# Altium PCB 2024_Nov_24_Esp32.PcbDoc
Units mil, origin at the board's own origin, x right, y up, seen from the top; angles counter-clockwise.
Board outline 3582.68 x 2204.72 mil, 2 copper layers (Top Layer, Bottom Layer); 62 components, 37 nets, 230 pads, 75 vias.
Unrouted connection lines stored in the file: 40.
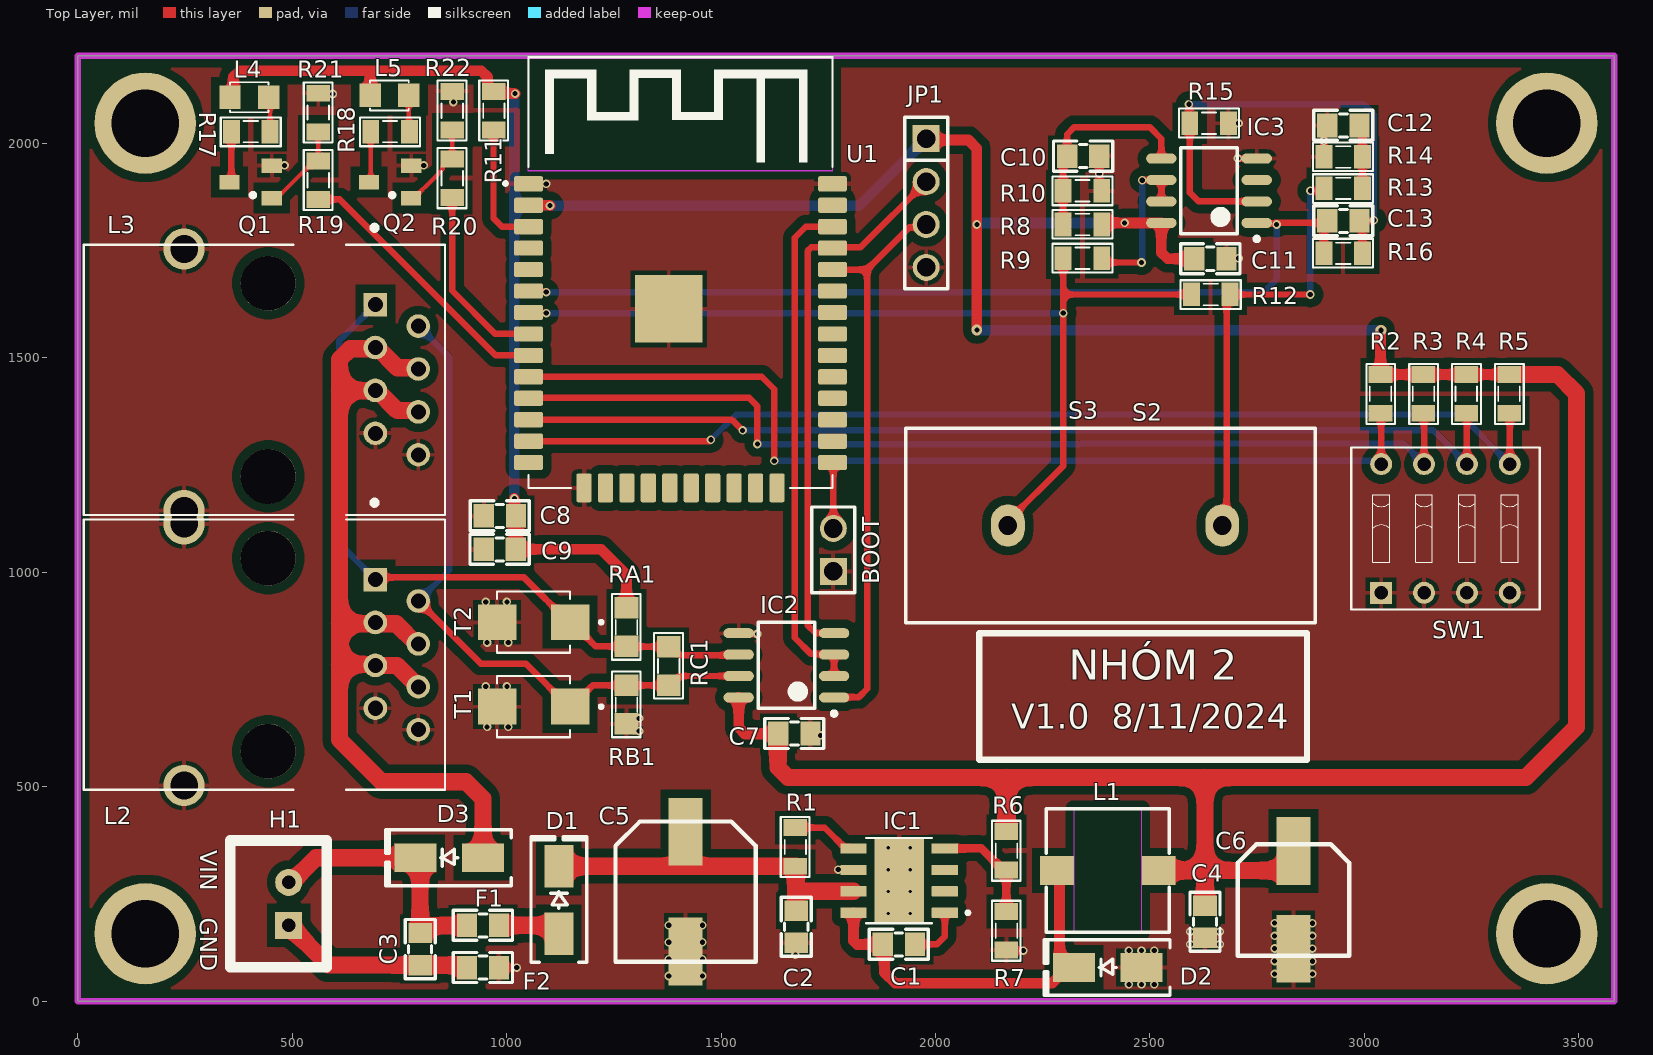
[diagram p0: Top Layer view]
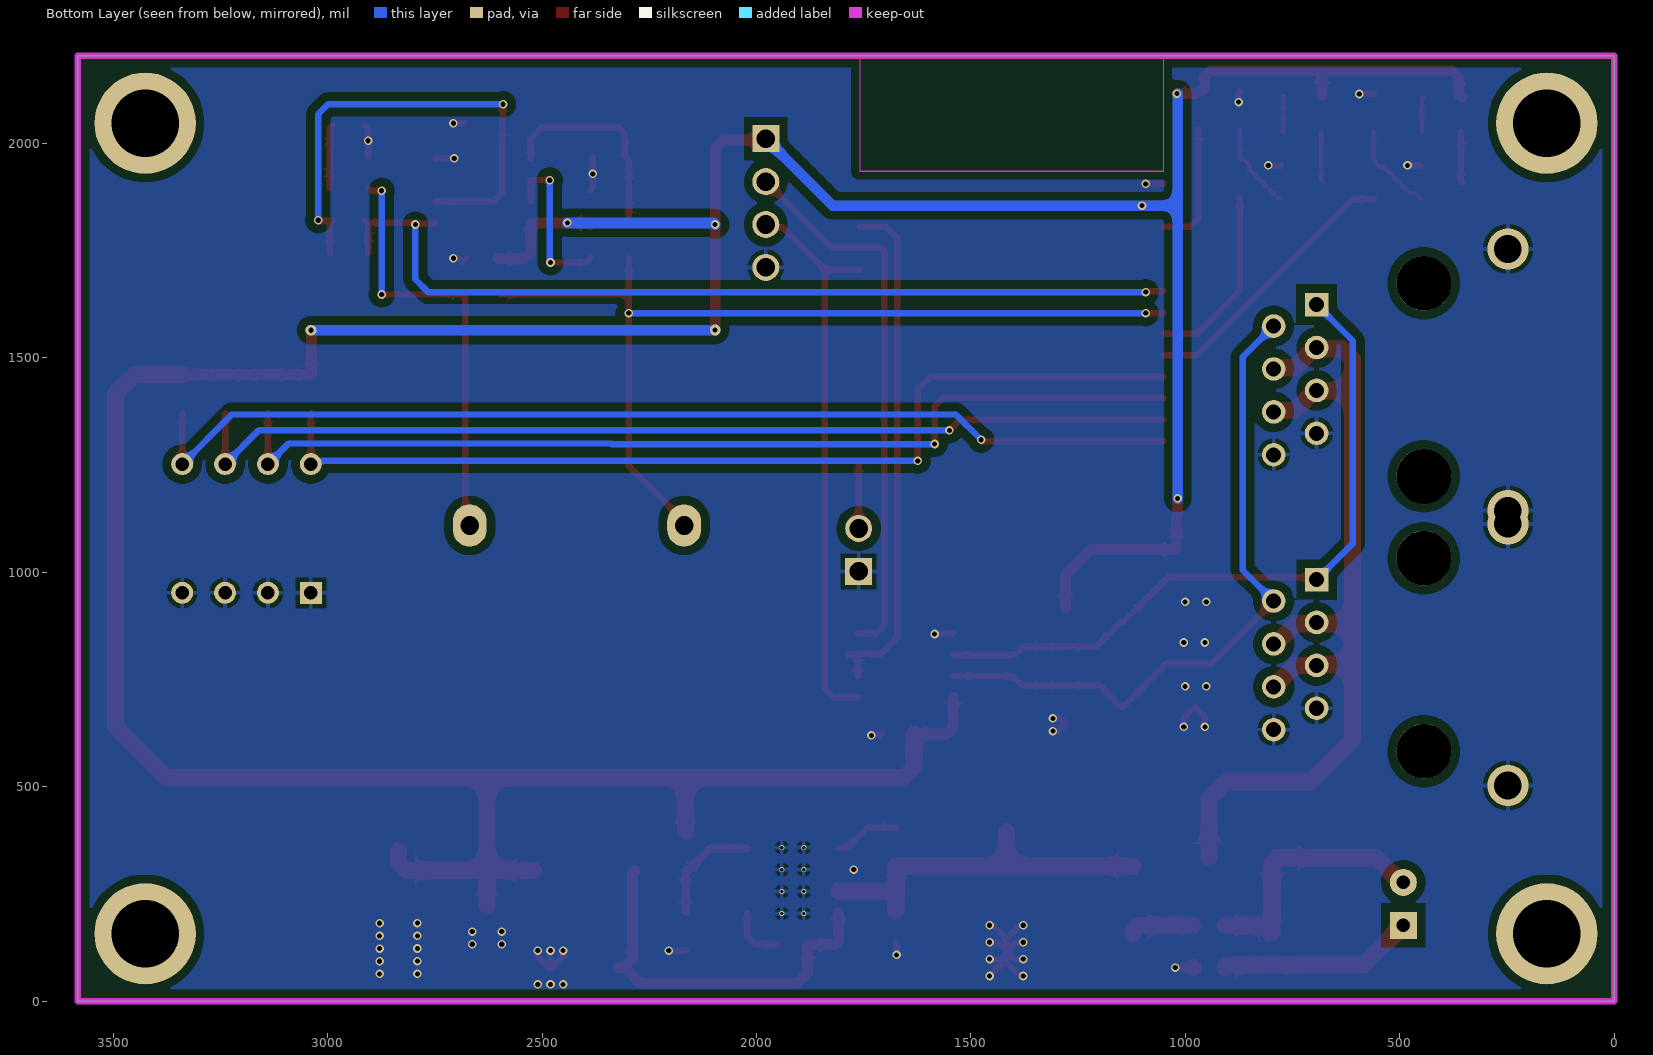
[diagram p1: Bottom Layer view, seen from below]
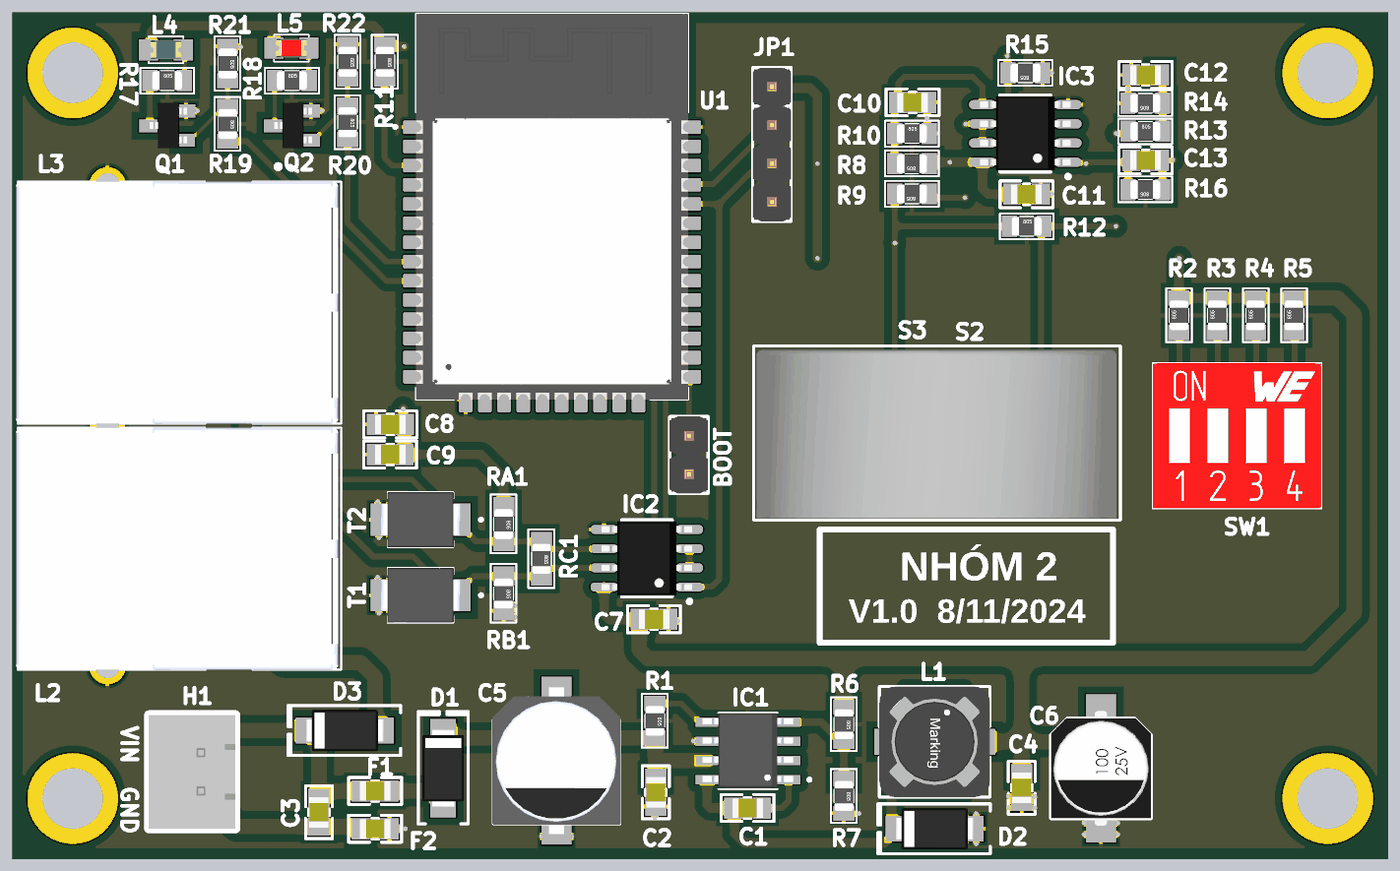
[diagram p2: 3D render of the assembled board from above, using the file's embedded part models]

## Layer stack, top to bottom
Top Solder: solder mask 0.4, Solder Resist, Dk 3.5
Top Layer: signal copper 1.4
Dielectric 1: dielectric 12.6, FR-4, Dk 4.8
Bottom Layer: signal copper 1.4
Bottom Solder: solder mask 0.4, Solder Resist, Dk 3.5

## Board outline
0,0 0,2204.72 3582.68,2204.72 3582.68,0

## Design rules (kind name [scope] priority, off if disabled: settings)
Clearance [All] p1: gap=20 ignorepadtopadclearanceinfootprint=FALSE
PolygonConnect [All] p1: thpad.connectstyle=Relief thpad.reliefconductorwidth=10 thpad.reliefentries=4 thpad.polygonreliefangle="90 Angle" thpad.airgapwidth=10 smdpad.connectstyle=Relief smdpad.reliefconductorwidth=10 smdpad.reliefentries=4 smdpad.polygonreliefangle="90 Angle" smdpad.airgapwidth=10 via.connectstyle=Direct via.reliefconductorwidth=10 via.reliefentries=4 via.polygonreliefangle="90 Angle" via.airgapwidth=10
RoutingVias [All] p1: holewidth=12 width=20 viastyle="Through Hole" minholewidth=12 minwidth=20 maxholewidth=12 maxwidth=20
SolderMaskExpansion [All] p1: expansion=4 istentingtop=FALSE
Width [All] p1: maxlimit=70 minlimit=10 preferedwidth=20
30 further rules are at their usual default settings.

## Classes and differential pairs
component class 2024_Nov_24_Esp32: BOOT C2 C7 C8 C9 C10 C12 D2 D3 F1 F2 H1 IC1 IC2 IC3 JP1 L1 L3 L4 L5 q Q1 Q2 R1 R2 R3 R4 R5 R6 R7 R8 R9 R10 R13 R14 R15

## Components (designator, comment, footprint, x,y, rotation, side; value= is the part's Value field where it differs from the comment)
BOOT "JUMPER" "JP 1x2 DT" 1761.81,1002.36 r90 top (schematic designator JP2)
C1 "104" "tu 0805"#1 1909.45,137.8 r0 top
C2 "105" "tu 0805"#1 1680.67,178.82 r270 top
C3 "105" "tu 0805"#1 803.69,126.86 r270 top
C4 "104" "tu 0805"#1 2623.24,180.37 r90 top
C5 "100uF/35V" "tu nhom 8 (f)" 1417.32,255.91 r270 top
C6 "220uF/16V" "tu nhom 6.3 (d)" 2834.65,236.22 r270 top
C7 "104" "tu 0805"#2 1670.86,624.44 r0 top
C8 "22uF" "tu 0805"#2 984.25,1131.89 r0 top
C9 "104" "tu 0805"#2 983.88,1053.75 r0 top
C10 "105" "tu 0805"#1 2339.11,1975.56 r0 top
C11 "104" "tu 0805"#1 2645.93,1726.23 r180 top
C12 "104" "tu 0805"#1 2945.76,2047.06 r0 top
C13 "104" "tu 0805"#1 2945.76,1824.67 r0 top
D1 "SS34" "DIODE SMA" 1122.05,236.22 r90 top
D2 "SS34" "DIODE SMA" 2401.57,78.74 r180 top
D3 "SS34" "DIODE SMA" 866.14,334.65 r180 top
F1 "Fast Acting" "TU 0805" 944.88,177.17 r0 top value=500mA
F2 "Fast Acting" "TU 0805" 944.88,78.74 r0 top value=500mA
H1 "Power" XH2.54M-2 492.13,177.17 r90 top
IC1 "TPS5430 5.5-36V 3A" TPS5430 1915.35,281.5 r180 top
IC2 "MAX3485" "SOp 8" 1652.32,783.27 r180 top
IC3 "LM358" SO8 2637.8,1889.76 r180 top
JP1 "NAP" "JP 1x4 DT" 1978.35,2011.02 r270 top
L1 "15uH" L-SMD-M-7.3x4.5 2401.57,305.12 r90 top
L2 "RJ45" "Ethernet HR911105A" 444.17,808.07 r90 top
L3 "RJ45" "Ethernet HR911105A" 444.17,1448.98 r90 top
L4 "LED 0805" LED-0805-Blue 355.18,2107.47 r0 top
L5 "LED 0805" LED-0805-Red 681.85,2111.99 r0 top
Q1 "HF" SOT23 403.54,1909.45 r90 top value=C9014
Q2 "HF" SOT23 728.35,1909.45 r90 top value=C9014
R1 "N/A" RES-SMD-0805 1673.23,359.96 r270 top
R2 "10K" RES-SMD-0805 3037.53,1416.1 r90 top
R3 "10K" RES-SMD-0805 3137.44,1416.1 r90 top
R4 "10K" RES-SMD-0805 3237.36,1416.1 r90 top
R5 "10K" RES-SMD-0805 3337.27,1416.1 r90 top
R6 "10K" RES-SMD-0805 2165.35,350.98 r270 top
R7 "5.9K" RES-SMD-0805 2165.35,164.41 r270 top
R8 "1K" RES-SMD-0805 2342.52,1811.02 r180 top
R9 "1K" RES-SMD-0805 2342.52,1732.28 r180 top
R10 "1K" RES-SMD-0805 2342.52,1889.76 r0 top
R11 "10K" RES-SMD-0805 970.32,2076.49 r270 top
R12 "100" RES-SMD-0805 2641.48,1648.03 r0 top
R13 "1K" RES-SMD-0805 2950.33,1895.33 r0 top
R14 "1K" RES-SMD-0805 2950.33,1968.5 r180 top
R15 "1K" RES-SMD-0805 2637.8,2047.24 r180 top
R16 "1K" RES-SMD-0805 2950.33,1743.79 r180 top
R17 "330" RES-SMD-0805 403.54,2027.56 r0 top
R18 "330" RES-SMD-0805 728.35,2027.56 r0 top
R19 "4k7" RES-SMD-0805 561.02,1914.48 r270 top
R20 "4k7" RES-SMD-0805 873.18,1919.01 r270 top
R21 "47k" RES-SMD-0805 561.02,2071.96 r270 top
R22 "47k" RES-SMD-0805 873.18,2076.49 r270 top
RA1 "10k" SM-RES-0805 1279.53,917.28 r270 top value="R1/4W - 1K"
RB1 "10k" SM-RES-0805 1279.53,736.71 r270 top value="R1/4W - 1K"
RC1 "120R" SM-RES-0805 1377.95,826.77 r270 top value="R1/4W - 1K"
S2 "TA12" TA12 2393.11,1079.84 r0 top
S3 "TA17" TA12 2393.11,1079.84 r0 top
SW1 "" SW-DIP4 3188.98,1102.36 r0 top (schematic designator S1)
T1 "TVS BMJ60" "TVS BMJ60" 1062.99,688.98 r180 top
T2 "TVS BMJ60" "TVS BMJ60" 1062.99,885.83 r180 top
U1 "ESP32-Wroom-32" ESP32-Wroom-32 1404.51,1581.91 r0 top

## Footprints (in the part's own frame and the unit in brackets; to place one, negate y for a bottom-side part, rotate by r counter-clockwise, add the part's x,y. Pads: shape width x height; smd on the part's side, far side on the other; paste and mask are expansions set on the pad)
"DIODE SMA" [mm] "SMA"
  rect 2.5x1.7 smd: 1(-2,0) 2(2,0)
  silkscreen extent -3.68,-1.65 3.75,1.65, body extent -2.6,-1.37 2.6,1.37, height 2.4
ESP32-Wroom-32 [mm]
  rrect22% 1.7x0.9 smd: 1(-8.975,8.23) 2(-8.975,6.96) 3(-8.975,5.69) 4(-8.975,4.42) 5(-8.975,3.15) 6(-8.975,1.88) 7(-8.975,0.61) 8(-8.975,-0.66) 9(-8.975,-1.93) 10(-8.975,-3.2) 11(-8.975,-4.47) 12(-8.975,-5.74) 13(-8.975,-7.01) 14(-8.975,-8.28) 25(9.025,-8.28) 26(9.025,-7.01) 27(9.025,-5.74) 28(9.025,-4.47) 29(9.025,-3.2) 30(9.025,-1.93) 31(9.025,-0.66) 32(9.025,0.61) 33(9.025,1.88) 34(9.025,3.15) 35(9.025,4.42) 36(9.025,5.69) 37(9.025,6.96) 38(9.025,8.23)
  rrect22% 0.9x1.7 smd: 15(-5.69,-9.78) 16(-4.42,-9.78) 17(-3.15,-9.78) 18(-1.88,-9.78) 19(-0.61,-9.78) 20(0.66,-9.78) 21(1.93,-9.78) 22(3.2,-9.78) 23(4.47,-9.78) 24(5.74,-9.78)
  rect 4x4 smd: 39(-0.675,0.82)
  Keep-Out Layer region: 9.025,8.986 -8.986,8.986 -8.986,15.725 9.025,15.725
  Keep-Out Layer region: 9.025,9 -9,9 -9,15.725 9.025,15.725
  silkscreen extent -10.44,-9.78 9.03,15.72, body extent -8.97,-9.78 9.03,15.72, height 3.25
"Ethernet HR911105A" [mm]
  rect 1.398x1.398 hole 0.89: 1(4.45,-6.35)
  round 1.398 hole 0.89: 2(3.18,-8.89) 3(1.91,-6.35) 4(0.64,-8.89) 5(-0.63,-6.35) 6(-1.9,-8.89) 7(-3.17,-6.35) 8(-4.44,-8.89)
  round 1.53 on Top Overlay: 9(6.625,4.9) 10(4.085,4.9) 11(-4.085,4.9) 12(-6.625,4.9)
  round 2.445 hole 1.63: 15(7.745,4.982) 16(-7.745,4.982)
  round 3.25 hole 3.25 unplated: ""(-5.715,0) ""(5.715,0)
  silkscreen extent -8,-10.48 9.15,10.92, body extent -8.02,-10.27 8.02,11.03, height 13.5
"JP 1x2 DT" [mm] "2 pins, 1 row, straight, gold plating"
  rect 1.6x1.6 hole 1.1: 1(0,0)
  round 1.6 hole 1.1: 2(2.54,0)
  silkscreen extent -1.27,-1.27 3.81,1.27, body extent -1.27,-1.27 3.81,1.27, height 8.54
"JP 1x4 DT" [mm] "4 pins, 1 row, straight, gold plating"
  rect 1.6x1.6 hole 1.1: 1(0,0)
  round 1.6 hole 1.1: 2(2.54,0) 3(5.08,0) 4(7.62,0)
  silkscreen extent -1.27,-1.27 8.89,1.27, body extent -1.27,-1.27 8.89,1.27, height 8.54
L-SMD-M-7.3x4.5 [mm] "WE-PDA SMD Shielded Power Inductor, 7345"
  rect 1.7x2 smd: 1(0,3) 2(0,-3)
  Top Layer keep-out region: -3.65,-2 3.65,-2 3.65,2 -3.65,2
  silkscreen extent -3.65,-3.65 3.65,3.65, body extent -3.65,-3.65 3.65,3.65, height 4.05
LED-0805-Blue [mil]
  rect 50x55 smd: 1(0,0) 2(90,0)
  silkscreen extent 0,-35 90,35, body extent 5,-25 85,25, height 43
LED-0805-Red [mil]
  rect 50x55 smd: 1(0,0) 2(90,0)
  silkscreen extent 0,-35 90,35, body extent 5,-25 85,25, height 43
RES-SMD-0805 [mil]
  rect 39.37x55 smd: 1(-45,0) 2(45,0)
  silkscreen extent -70,-34 70,33, body extent -39,-25 39,25, height 31
SM-RES-0805 [mil]
  rect 50x55 smd: 1(0,0) 2(90,0)
  silkscreen extent -32,-34 121,33, body extent 6,-25 84,25, height 31
SO8 [mm] "SOIC, 8-Leads, Body 4.9x3.9mm, Pitch 1.27mm, IPC High Density"
  oval 1.8x0.6 smd: 1(-2.825,1.905) 2(-2.825,0.635) 3(-2.825,-0.635) 4(-2.825,-1.905) 5(2.825,-1.905) 6(2.825,-0.635) 7(2.825,0.635) 8(2.825,1.905)
  silkscreen extent -2.95,-2.55 1.68,2.98, body extent -2.99,-2.45 3,2.45, height 1.6
"SOp 8" [mm] "SOIC, 8-Leads, Body 4.9x3.9mm, Pitch 1.27mm, IPC High Density"
  oval 1.8x0.6 smd: 1(-2.825,1.905) 2(-2.825,0.635) 3(-2.825,-0.635) 4(-2.825,-1.905) 5(2.825,-1.905) 6(2.825,-0.635) 7(2.825,0.635) 8(2.825,1.905)
  silkscreen extent -2.95,-2.55 1.68,2.98, body extent -2.99,-2.45 3,2.45, height 1.6
SOT23 [mm] "SOT 23 _ 1-3-2"
  rect 0.85x1.2 smd: 1(-0.94,-1.245) 2(0.985,-1.25) 3(0.005,1.25)
  silkscreen extent -0.88,-0.25 -0.64,0, body extent -1.47,-1.33 1.53,1.17, height 1.06
SW-DIP4 [mm] "04p, 2.54mm Pitch, Horizontal, Box Type, THT, flat Actuator, red, without Tape, Tube"
  rect 1.3x1.3 hole 0.8: 1(-3.81,-3.81)
  round 1.3 hole 0.8: 2(-1.27,-3.81) 3(1.27,-3.81) 4(3.81,-3.81) 5(3.81,3.81) 6(1.27,3.81) 7(-1.27,3.81) 8(-3.81,3.81)
  silkscreen extent -5.58,-4.8 5.58,4.8, body extent -5.58,-4.8 5.58,4.8, height 5.4
TA12 [mm]
  oval 2x2.5 hole 1.1: 1(-5.7,0.75) 2(7,0.75)
  silkscreen extent -11.75,-5 12.5,6.5, body extent -11.57,-4.87 12.25,6.25, height 23.82
TPS5430 [mm]
  rrect5% 1.55x0.6 smd mask+0: 1(-2.7,1.905) 2(-2.7,0.635) 3(-2.7,-0.635) 4(-2.7,-1.905) 5(2.7,-1.905) 6(2.7,-0.635) 7(2.7,0.635) 8(2.7,1.905)
  rect 2.95x4.9 smd paste-3 mask+0: 9(0,0)
  round 0.3 hole 0.2: 10(-0.65,1.95) 11(0.65,1.95) 12(-0.65,0.65) 13(0.65,0.65) 14(-0.65,-0.65) 15(0.65,-0.65) 16(-0.65,-1.95) 17(0.65,-1.95)
  silkscreen extent -4.17,-2.52 1.95,2.52, body extent -3,-2.5 3,2.4, height 1.7
"tu 0805"#1 [mm]
  rect 1.2x1.4 smd: 1(-0.819,-0.13) 2(1.081,-0.13)
  silkscreen extent -1.63,-1.02 1.88,0.76, body extent -0.88,-0.77 1.14,0.5, height 0.61
"tu 0805"#2 [mm] "Compoment SMD 80x50mil"
  rect 1.2x1.4 smd: 1(-0.946,-0.003) 2(0.954,-0.003)
  silkscreen extent -1.75,-0.89 1.75,0.89, body extent -1.01,-0.64 1.01,0.63, height 0.61
"TU 0805" [mm] "Compoment SMD 80x50mil"
  rect 1.2x1.4 smd: 1(-0.946,-0.003) 2(0.954,-0.003)
  silkscreen extent -1.75,-0.89 1.75,0.89, body extent -1.01,-0.64 1.01,0.63, height 0.61
"tu nhom 6.3 (d)" [mm]
  rect 4x2 smd: 1(-2.9,0) 2(2.9,0)
  silkscreen extent -3.3,-3.3 3.3,3.3, body extent -3.8,-3.3 3.8,3.3, height 8
"tu nhom 8 (f)" [mm]
  rect 4x2 smd: 1(-3.55,0) 2(3.55,0)
  silkscreen extent -4.15,-4.15 4.15,4.15, body extent -4.85,-4.25 4.85,4.25, height 10.5
"TVS BMJ60" [mm]
  rect 2.28x2.12 smd: A(2.165,0.051) C(-2.165,0.051)
  silkscreen extent -4.1,-1.76 2.16,1.86, body extent -2.67,-1.76 2.67,1.86, height 2.65
XH2.54M-2 [mm]
  rect 1.6x1.6 hole 0.8: 1(0,0)
  round 1.6 hole 0.8: 2(2.54,0)
  silkscreen extent -2.48,-2.26 5.02,3.46, body extent -2.48,-2.26 5.02,3.48, height 6.91

## Part data
BOOT: library part "JP 1x2 2.54 Duc Thang", "Cắm", Chung_Loai=Cắm, Don_Vi=Con, Ma_Hang=MH000903, Ten_Linh_Kien="Jump Đơn Đực 2.54MM 1x40P Thẳng 11MM"
C1 C2 C3 C4 C8 C9 C10 C11 C12 C13: library part "Tu 0805 105 50V 10%", "Dán", Chung_Loai=Dán, Don_Vi=Con, Ma_Hang=MH004552, So_Chan=2, Ten_Linh_Kien="Tụ 0805 105-1uF 10% 50V"
C5: library part "Tu Nhom 100uF 50V", "Dán", Chung_Loai=Dán, Don_Vi=Con, Ma_Hang=MH002223, So_Chan=2, Ten_Linh_Kien="Tụ Nhôm 100uF 50V 8x10.2MM"
C6: library part "Tu Nhom 220uF 16V", "Dán", Chung_Loai=Dán, Don_Vi=Con, Ma_Hang=MH002227, So_Chan=2, Ten_Linh_Kien="Tụ Nhôm 220uF 16V 6.3x7.7MM"
C7: library part "Tu 0805 104 50V 10%", "Dán", Chung_Loai=Dán, Don_Vi=Con, Ma_Hang=MH004551, So_Chan=2, Ten_Linh_Kien="Tụ 0805 104-100nF 10% 50V"
D1 D2 D3: library part "Diode SS34 ( 1N5822 )", "Dán", Chung_Loai=Dán, Don_Vi=Con, Ma_Hang=MH002104, Ten_Linh_Kien="Diode SS34 3A 40V SMA ( 1N5822 SS34A)"
F1 F2: library part FUSE_FAST_500mA_0603, "Fuse 500mA 32VDC 0603 SMD", DC Cold Resistance="0.25 Ohm", Manufacturer 1="AVX Corporation", Manufacturer Part Number 1=F0603E0R50FSTR, Operating Temperature="-55°C ~ 125°C", Package / Case="0603 (1608 metric)", Ratings="500mA; 32VDC; fast acting", Supplier Part Number 1=478-2860-1-ND, ComponentLink1Description=http://www.avx.com/docs/Catalogs/accug2.pdf, ComponentLink1URL=http://www.avx.com/docs/Catalogs/accug2.pdf, Fuse Type="Fast Acting", SCDType=source, Supplier 1=Digi-Key
H1: library part "Header 2P 2.54 Duc Thang", "Cắm", Chung_Loai=Cắm, Don_Vi=Con, Ma_Hang=MH001283, Ten_Linh_Kien="Header 2P XH2.54-2P Đực Thẳng"
IC1: library part TPS5430, "BUY: https://www.mouser.vn/ProductDetail/Texas-Instruments/TPS5430DDAR?qs=zwk82MlA57ZJdOTovH1aYA%3D%3D       DATASHEET: https://pdf1.alldatasheet.com/datasheet-pdf/view/132224/TI/TPS5430.html"
IC2: library part MAX485, "RS232 - RS485 (Same sn75176)"
IC3: "Low-Power Dual Operational Amplifier"
JP1: library part "JP 1x4 2.54 Duc Thang", "Cắm", Chung_Loai=Cắm, Don_Vi=Con, Ma_Hang=MH000903, Ten_Linh_Kien="Jump Đơn Đực 2.54MM 1x40P Thẳng 11MM"
L1: library part L-SMD-1, Inductance="1.0 μH", Manufacturer="Wurth Elektronik", partNo=78477010, ComponentLink1Description=Manufacturer, ComponentLink1URL=http://www.we-online.de, ComponentLink2Description=Datasheet, ComponentLink2URL=http://katalog.we-online.de/pbs/datasheet/78477010.pdf, Created by="Baojun Chen", Created Date=Nov.2015
L2 L3: library part Ethernet-LAN
L4: library part "LED 0805 Xanh Duong", "Dán", Chung_Loai=Dán, Don_Vi=Con, Ma_Hang=MH002327, Ten_Linh_Kien="LED 0805 Màu Xanh Dương (Blue)"
L5: library part "LED 0805 Do", "Dán", Chung_Loai=Dán, Don_Vi=Con, Ma_Hang=MH000897, Ten_Linh_Kien="LED 0805 Màu Đỏ (Red)"
Q1 Q2: library part "C1815 HF SMD", "NPN transistor"
R1 R2 R3 R4 R5 R6 R7 R8 R9 R10 R11 R12 R13 R14 R15 R16 R17 R18 R19 R20 R21 R22: library part Res-SMD, "Resistor", Manufacturer="Generic Components", Class=Passive, Published=08/06/2000, Publisher="Altium Hobart Technology Centre"
RA1 RB1 RC1: library part R1/4W, "Resistor 1/4W"
S3: library part TA12
SW1: library part SWDIP4, "WS-DITV 2.54 mm small compact THT flat actuator with top tape", Manufacturer="Wurth Elektronik", Part No.=418127160904, ComponentLink1 Description=Manufacturer, ComponentLink1URL=http://www.we-online.com, ComponentLink2 Description=Datasheet, ComponentLink2URL=http://katalog.we-online.de/em/datasheet/4181271609xx.pdf, Created by="Baojun Chen", Created Date=Dec.2015, Pole=04

## Free pads (board coordinates)
  round 236.22 hole 157.48: 3(157.48,157.48) 3(157.48,2047.24) 3(3425.2,157.48) 3(3425.2,2047.24)

## Via types
v1: diameter 20, hole 12, Top Layer to Bottom Layer, tented both sides, 73 vias
v2: diameter 25, hole 12, Top Layer to Bottom Layer, tented both sides, 2 vias

## Nets (pads, with @x,y where several pads share a name; then routed paths per layer and width w, separated by ;. In a path a pad name is that pad's centre, name@x,y a point inside that pad or via, vN(x,y) a via of type N, cw(c..) or ccw(c..) an arc to the next point about the centre after c; other vN are vias at no path point)
3V3: C4.2 C6.1 C7.1 C8.2 C9.2 C11.2 IC2.8 IC3.8 JP1.1 L1.2 L4.1 L5.1 R2.2 R3.2 R4.2 R5.2 R6.1 R8.1 R11.1 RA1.1 U1.2 | length 9738.2
  Top Layer w25: L4.1 363.1,2115.38 363.1,2155.08 377.74,2169.72 688.98,2169.72 ; L5.1 681.85,2162.59 688.98,2169.72 ; v1(1018.22,1172.45) 1018.22,1134.99 1021.64,1131.57 1021.64,1053.8 C9.2 1220.01,1053.61 1279.53,994.09 RA1.1 ; v1(1020,2116.14) 975.66,2116.14 R11.1 962.5,2121.49 955.32,2128.67 955.32,2155.08 940.67,2169.72 688.98,2169.72 ; U1.2 1100.44,1855.91 v1(1101.29,1855.06) ; IC2.8 1541.1,638.1 1555.74,623.45 C7.1@1632.77,623.45 ; JP1.1 1981.5,2007.87 2076.77,2007.87 2096.46,1988.19 v2(2096.46,1564.96) ; R8.1 2391.26,1814.76 v1(2440.94,1814.76) IC3.8 2526.57,1746 2541.22,1731.36 C11.2 ; v2(3038.68,1564.41) 3037.53,1563.26 R2.2 R3.2 R4.2 R5.2
  Top Layer w40: C7.1@1632.77,623.45 1632.77,545.09 1656.2,521.65 2165.35,521.65 ; R6.1 2165.35,521.65 ; L1.2 2627.95,305.12 ; C4.2 2628.38,304.69 2627.95,305.12 ; C6.1 2834.65,324.49 2815.28,305.12 2627.95,305.12 ; R5.2 3450.32,1461.1 3494.09,1417.32 3494.09,639.76 3375.98,521.65 2627.95,521.65 ; 2165.35,521.65 2627.95,521.65 ; 2627.95,305.12 2627.95,521.65
  Bottom Layer w25: v1(1018.22,1172.45) 1018.22,1855.06 ; v1@1018.22,2116.14 1018.22,1855.06 ; JP1.1 1822.38,1855.06 v1(1101.29,1855.06) 1018.22,1855.06 ; v2(2096.46,1564.96) 2097.01,1564.41 v2(3038.68,1564.41) ; v1(2096.46,1811.02) 2100.2,1814.76 v1(2440.94,1814.76)
3V3/2: R9.2 R12.1 S2.1 S3.1 U1.7 | length 2350.7
  Top Layer w15: U1.7 1052.76,1604.33 v1(1092.52,1604.33) ; S3.1 2168.7,1119.21 2297.52,1248.03 2297.52,1647.89 ; v1(2297.96,1604.46) 2297.74,1604.68 2297.74,1647.89 ; R12.1@2596.48,1647.89 2297.74,1647.89 ; 2297.52,1647.89 2297.74,1647.89 ; 2297.52,1647.89 R9.2 2297.74,1732.06 2297.74,1647.89
  Bottom Layer w15: v1(1092.52,1604.33) 2293.31,1604.33 2293.44,1604.46 v1(2297.96,1604.46)
ADC1_CH6: C13.1 IC3.1 R16.2 U1.6 | length 2129.4
  Top Layer w15: U1.6 1090.16,1655.91 v1(1092.52,1653.54) ; IC3.1 2750.67,1813.11 2791.83,1813.11 2793.92,1811.02 v1(2795.28,1811.02) ; v1@2791.54,1814.76 C13.1@2908.76,1814.76 ; R16.2 2905.33,1811.33 C13.1@2908.76,1814.76 ; C13.1 C13.1@2908.76,1814.76
  Bottom Layer w15: v1(1092.52,1653.54) 2765.75,1653.54 2795.28,1683.07 v1(2795.28,1811.02)
ADC_IN: R12.2 R13.1 S2.2 S3.2 | length 1007.4
  Top Layer w15: S3.2 2678.84,1119.51 2678.84,1640.4 R12.2 ; R12.2@2686.63,1647.88 v1@2872.33,1647.88 ; v1(2874.02,1889.76) 2899.76,1889.76 R13.1
  Bottom Layer w15: v1(2873.68,1647.88) 2873.85,1648.05 2873.85,1889.6 v1(2874.02,1889.76)
GND: BOOT.1 C2.2 C4.1 C5.2 C6.2 C7.2 C8.1 C9.1 C10.2 C11.1 C12.1 D2.1 F2.2 IC1.6 IC1.9 IC1.10 IC1.11 IC1.12 IC1.13 IC1.14 IC1.15 IC1.16 IC1.17 IC2.5 IC3.4 JP1.4 L2.7 L2.8 L2.15 L2.16 L3.7 L3.8 L3.15 L3.16 Q1.2 Q2.2 R7.2 R10.2 R14.2 R15.1 R21.1 R22.1 RB1.2 SW1.1 SW1.2 SW1.3 SW1.4 T1.A T2.A U1.1 U1.15 U1.38 U1.39 | length 1395.3
  Top Layer w15: Q1.2 453.33,1948.82 v1(482.28,1948.82) ; R21.1 561.85,2116.14 595.62,2116.14 v1(594.82,2115.34) ; Q2.2 777.85,1948.53 806.8,1948.53 v1(807.09,1948.82) ; R22.1 875.98,2118.69 v1(875.98,2096.46) ; v1(954.72,639.76) 954.72,663.94 T1.A 1003.94,660.8 v1(1003.94,639.76) ; F2.2@982.59,78.74 v1(1023.62,78.74) ; U1.1 1051.28,1905.8 1092.42,1905.8 v1(1092.52,1905.7) ; v1(1309.06,629.92) 1296.32,629.92 RB1.2 1292.27,659.45 v1(1309.06,659.45) ; v1(1377.95,59.06) 1385.45,59.06 1417.32,90.93 C5.2@1417.32,98.43 ; v1(1377.95,98.43) 1399.61,98.43 C5.2 ; v1(1377.95,137.8) 1395.67,137.8 C5.2 ; v1(1377.95,177.17) 1385.45,177.17 C5.2@1417.32,145.3 ; v1(1456.69,59.06) C5.2@1417.32,98.43 ; v1(1456.69,98.43) 1429.51,98.43 C5.2@1417.32,110.61 ; v1(1456.69,137.8) 1438.98,137.8 C5.2 ; v1(1456.69,177.17) 1449.19,177.17 C5.2@1417.32,145.3 ; IC2.5 1542.75,856.62 1584.32,856.62 v1(1584.65,856.3) ; v1(1673.23,108.27) 1673.23,133.95 C2.2 ; C7.2 1712.66,620.08 v1(1732.28,620.08) ; R7.2 2166.66,118.11 v1(2204.72,118.11) ; C10.2 2381.89,1970.22 v1(2381.89,1929.13) 2381.89,1895.39 R10.2 ; v1(2450.79,118.11) 2450.79,104.7 2476.75,78.74 D2.1 ; v1(2480.32,118.11) D2.1 ; v1(2509.84,118.11) 2509.84,104.7 2483.88,78.74 D2.1 ; C11.1 2685.75,1723.77 2694.27,1732.28 v1(2706.69,1732.28) ; R15.1 v1(2706.69,2047.24) ; v1(2704.5,1964.99) 2704.61,1964.88 2748.9,1964.88 IC3.4 ; R14.2 v1(2905.33,2006.2) 2905.33,2033.72 C12.1 ; C5.2@1417.32,98.43 C5.2@1417.32,110.61 ; C5.2@1417.32,110.61 C5.2 ; C5.2 C5.2@1417.32,145.3
  Top Layer w40: F2.2 F2.2@982.59,78.74
  other v1: 2450.79,39.37 2480.32,39.37 2509.84,39.37 2790.59,64.08 2878.7,63.87 2878.7,93.4 2790.59,93.61 2790.59,123.13 2878.7,122.93 2593.74,132.98 2662.64,132.98 2878.7,152.46 2790.59,152.66 2593.74,162.51 2662.64,162.51 2790.59,182.19 2878.7,181.98 1773.3,307.07 951.57,734.19 1000.79,734.19 954.72,836.61 1003.94,836.61 951.57,931.04 1000.79,931.04
LED0: R20.2 U1.8 | length 437.3
  Top Layer w15: R20.2 873.18,1656.34 973.62,1555.91 U1.8
LED1: R19.2 U1.9 | length 640.8
  Top Layer w15: R19.2 610.83,1869.49 974.41,1505.91 U1.9
NetC1_2: C1.2 IC1.1 | length 132.6
  Top Layer w15: C1.2 2003.17,132.66 2021.65,151.15 IC1.1
NetC10_1: C10.1 IC3.5 R8.2 R10.1 | length 497.7
  Top Layer w15: R8.2 2297.52,1961.07 C10.1 2306.88,2021.45 2322.83,2037.4 2500,2037.4 2526.57,2010.83 IC3.5
NetC12_2: C12.2 R13.2 R14.1 | length 149.5
  Top Layer w15: C12.2 2995.32,2034.94 R13.2
NetC13_2: C13.2 IC3.2 R15.2 R16.1 | length 1170.4
  Top Layer w15: v1(2590.8,2091.27) 2591.76,2090.32 2591.76,2048.28 R15.2 2592.8,1885.55 2608.27,1870.07 2613.58,1864.76 IC3.2 ; R16.1 2995.33,1812.55 C13.2 3020.32,1819.54 v1(3021.65,1820.87)
  Bottom Layer w15: v1@2592.16,2091.27 2998.84,2091.27 3021.65,2068.46 v1(3021.65,1820.87)
NetD1_1: D1.1 F1.2 | length 151.3
  Top Layer w40: F1.2 1108.58,177.03 1122.05,163.57 D1.1
NetIC1_4: IC1.4 R6.2 R7.1 | length 261.2
  Top Layer w20: IC1.4 2107.03,356.5 2157.54,305.98 R6.2 R7.1
NetIC1_5: IC1.5 R1.1 | length 155.9
  Top Layer w15: R1.1 1741.89,404.96 1790.35,356.5 IC1.5
NetIC3_6: IC3.6 IC3.7 R9.1 | length 384.2
  Top Layer w15: R9.1 2397.36,1722.44 v1(2480.32,1722.44) ; v1(2481.98,1914.31) 2482.43,1914.76 IC3.6 IC3.7
  Bottom Layer w15: v1(2480.32,1722.44) 2481.98,1724.11 v1(2481.98,1914.31)
NetJP2_2: BOOT.2 U1.25 | length 154.4
  Top Layer w15: U1.25 1761.81,1253.94 BOOT.2
NetL4_2: L4.2 R17.2 | length 81.3
  Top Layer w10: L4.2 448.54,2104.1 R17.2
NetL5_2: L5.2 R18.2 | length 85
  Top Layer w10: L5.2 771.85,2029.06 R18.2
NetQ1_1: Q1.1 R19.1 R21.2 | length 212
  Top Layer w10: Q1.1 464.28,1884.18 476.7,1884.18 537.32,1944.8 546.34,1944.8 R19.1 R21.2
NetQ1_3: Q1.3 R17.1 | length 119.7
  Top Layer w15: Q1.3 358.54,1913.86 R17.1
NetQ2_1: Q2.1 R20.1 R22.2 | length 207.3
  Top Layer w10: Q2.1 784.24,1872.45 831.86,1920.08 831.86,1920.2 850.68,1939.02 850.68,1949.32 865.37,1964.01 R20.1 R22.2
NetQ2_3: Q2.3 R18.1 | length 119.7
  Top Layer w10: Q2.3 683.34,1913.86 R18.1
NetR11_2: R11.2 U1.3 | length 296.9
  Top Layer w15: R11.2@969.56,2032.83 969.56,1825.72 989.37,1805.91 U1.3
PGND: C3.2 F2.1 H1.1 | length 457.6
  Top Layer w40: H1.1 585,84.29 C3.2 904.03,84.29 907.65,80.67 F2.1
PH: C1.1 D2.2 IC1.8 L1.1 | length 916.6
  Top Layer w25: IC1.8 1809.06,141.45 1817.84,132.66 C1.1 1880.84,129.04 1880.84,67.31 1906.35,41.8 2271.48,41.8 2286.12,56.45 2286.12,57.78 2307.09,78.74 D2.2@2316.93,78.74 ; L1.1 2289.02,299.56 2289.02,99.7 2309.99,78.74 D2.2
RS485_5V: D3.1 L2.3 L2.4 L2.5 L2.6 L3.3 L3.4 L3.5 L3.6 | length 2244
  Top Layer w40: L2.5@692.01,785.43 610.24,785.43 ; L3.5@693.58,1423.58 610.24,1423.58 ; L2.5 744.17,783.27 L2.6 ; L3.5 698.24,1424.17 745.37,1377.05 791.3,1377.05 L3.6 ; L2.4 790.1,833.27 742.98,880.39 697.05,880.39 L2.3 691.3,880.39 610.24,880.39 ; L3.4 791.3,1477.05 745.37,1477.05 698.24,1524.17 L3.3 691.3,1521.3 635.47,1521.3 610.24,1496.06 610.24,1423.58 ; D3.1 944.88,472.44 905.51,511.81 708.66,511.81 610.24,610.24 610.24,785.43 ; 610.24,785.43 610.24,880.39 ; 610.24,880.39 610.24,1423.58
RS485_A: IC2.6 L2.1 L3.1 RA1.2 RC1.1 T2.C | length 1642.2
  Top Layer w15: L2.1 698.82,987.91 698.82,994.09 704.63,988.29 1040.62,988.29 1145.08,883.83 T2.C 1151.38,883.83 1207.92,827.28 RA1.2 1280.04,826.77 RC1.1 1395.45,809.27 1404.04,809.27 1406.74,806.57 1513.44,806.57 1513.49,806.62 1539.99,806.62 IC2.6@1540.07,806.54
  Bottom Layer w15: L2.1 610.24,1067.2 610.24,1540.24 L3.1
RS485_B: IC2.7 L2.2 L3.2 RB1.1 RC1.2 T1.C | length 1578.9
  Top Layer w15: L2.2 940.04,787.4 1044.65,787.4 1145.08,686.98 T1.C 1151.38,686.98 1201.11,736.71 RB1.1 1380.39,736.71 1402.15,758.47 IC2.7@1540.9,758.47
  Bottom Layer w15: L2.2 866.14,1005.24 866.14,1502.2 L3.2
RS485_EN: IC2.2 IC2.3 U1.36 | length 1212.7
  Top Layer w15: U1.36 1697.64,1805.91 1671.8,1780.07 1671.8,847.89 1709.77,809.92 1761.89,809.92 IC2.3 ; IC2.2 IC2.3 ; IC2.3@1787.16,808.27 IC2.3
RXD0: IC2.1 JP1.3 U1.34 | length 1324.9
  Top Layer w15: U1.34 1840.55,1705.91 ; IC2.1 1764.53,709.27 1821.47,709.27 1840.55,728.35 1840.55,1705.91 ; JP1.3 1971.5,1804.18 1938.83,1804.18 1840.55,1705.91
SW1: R2.1 SW1.8 U1.10 | length 2289.8
  Top Layer w15: U1.10 1051.57,1456.3 1594.88,1456.3 1624.02,1427.17 v1(1624.02,1259.84) ; R2.1 3038.98,1369.66 SW1.8
  Bottom Layer w15: v1(1624.02,1259.84) 3012.1,1259.84 3012.66,1259.29 3032.05,1259.29 SW1.8
SW2: R3.1 SW1.7 U1.11 | length 2324.3
  Top Layer w15: U1.11 1051.97,1406.69 1565.75,1406.69 1584.65,1387.8 v1(1584.65,1299.21) ; R3.1 3138.98,1369.57 SW1.7
  Bottom Layer w15: v1(1584.65,1299.21) 2337.82,1299.21 2339.06,1300.45 3090.89,1300.45 SW1.7
SW3: R4.1 SW1.6 U1.12 | length 2350.6
  Top Layer w15: U1.12 1525.4,1355.91 v1(1550.16,1331.14) ; R4.1 3238.98,1369.48 SW1.6
  Bottom Layer w15: v1(1550.16,1331.14) 1550.74,1331.71 3159.63,1331.71 SW1.6
SW4: R5.1 SW1.5 U1.13 | length 2481
  Top Layer w15: U1.13 1473.23,1305.91 v1(1476.38,1309.06) ; R5.1 3338.98,1369.4 SW1.5
  Bottom Layer w15: v1(1476.38,1309.06) 1535.43,1368.11 3223.23,1368.11 SW1.5
TXD0: IC2.4 JP1.2 U1.35 | length 1284.1
  Top Layer w15: U1.35 1757.94,1757.81 1710.59,1757.81 1701.8,1749.02 1701.8,876.94 1720.47,858.27 IC2.4 ; U1.35@1761.74,1757.81 1825.13,1757.81 JP1.2
VIN: C3.1 D3.2 F1.1 H1.2 | length 615.8
  Top Layer w40: H1.2 498.35,277.17 555.83,334.65 D3.2 798.55,323.49 C3.1 802.49,159.09 820.43,177.03 F1.1
VIN_FIL: C2.1 C5.1 D1.2 IC1.7 R1.2 | length 872.2
  Top Layer w40: D1.2 1417.32,314.96 ; C5.1 1417.32,314.96 ; C2.1 1674.38,212.2 1674.38,255.91 ; IC1.7 1674.97,256.5 1674.38,255.91 ; 1417.32,314.96 1614.17,314.96 R1.2 1674.07,314.96 1674.38,314.65 1674.38,255.91
pads on no net: IC1.2 IC1.3 IC3.3 L2. L2.9 L2.10 L2.11 L2.12 L3. L3.9 L3.10 L3.11 L3.12 U1.4 U1.5 U1.14 U1.16 U1.17 U1.18 U1.19 U1.20 U1.21 U1.22 U1.23 U1.24 U1.26 U1.27 U1.28 U1.29 U1.30 U1.31 U1.32 U1.33 U1.37

## Polygon pours and split planes (outlines as drawn)
GND on Bottom Layer "GND_L02_P000" (solid, pour order 0): 0,2204.72 0,0 3582.68,0 3582.68,2204.72
GND on Top Layer "GND_L01_P001" (solid, pour order 1): 0,2204.72 0,0 3582.68,0 3582.68,2204.72

## Keep-outs
Keep-Out Layer:
  the board outline again, w15

## Silkscreen, mask and mechanical layers (free items; w line width, h text height)
Top Overlay:
  lines w15: 2102.36,562.99 2102.36,858.27 2866.14,858.27 2866.14,562.99 2102.36,562.99
  text "NHÓM 2" at 2311.02,725.85 h120
  text "V1.0  8/11/2024" at 2177.17,615.38 h100
  text "VIN" at 285.59,352.2 h40 r270
  text "GND" at 285.59,194.72 h40 r270